# EAGLE board tarjeta-v8 (EAGLE 6.4)
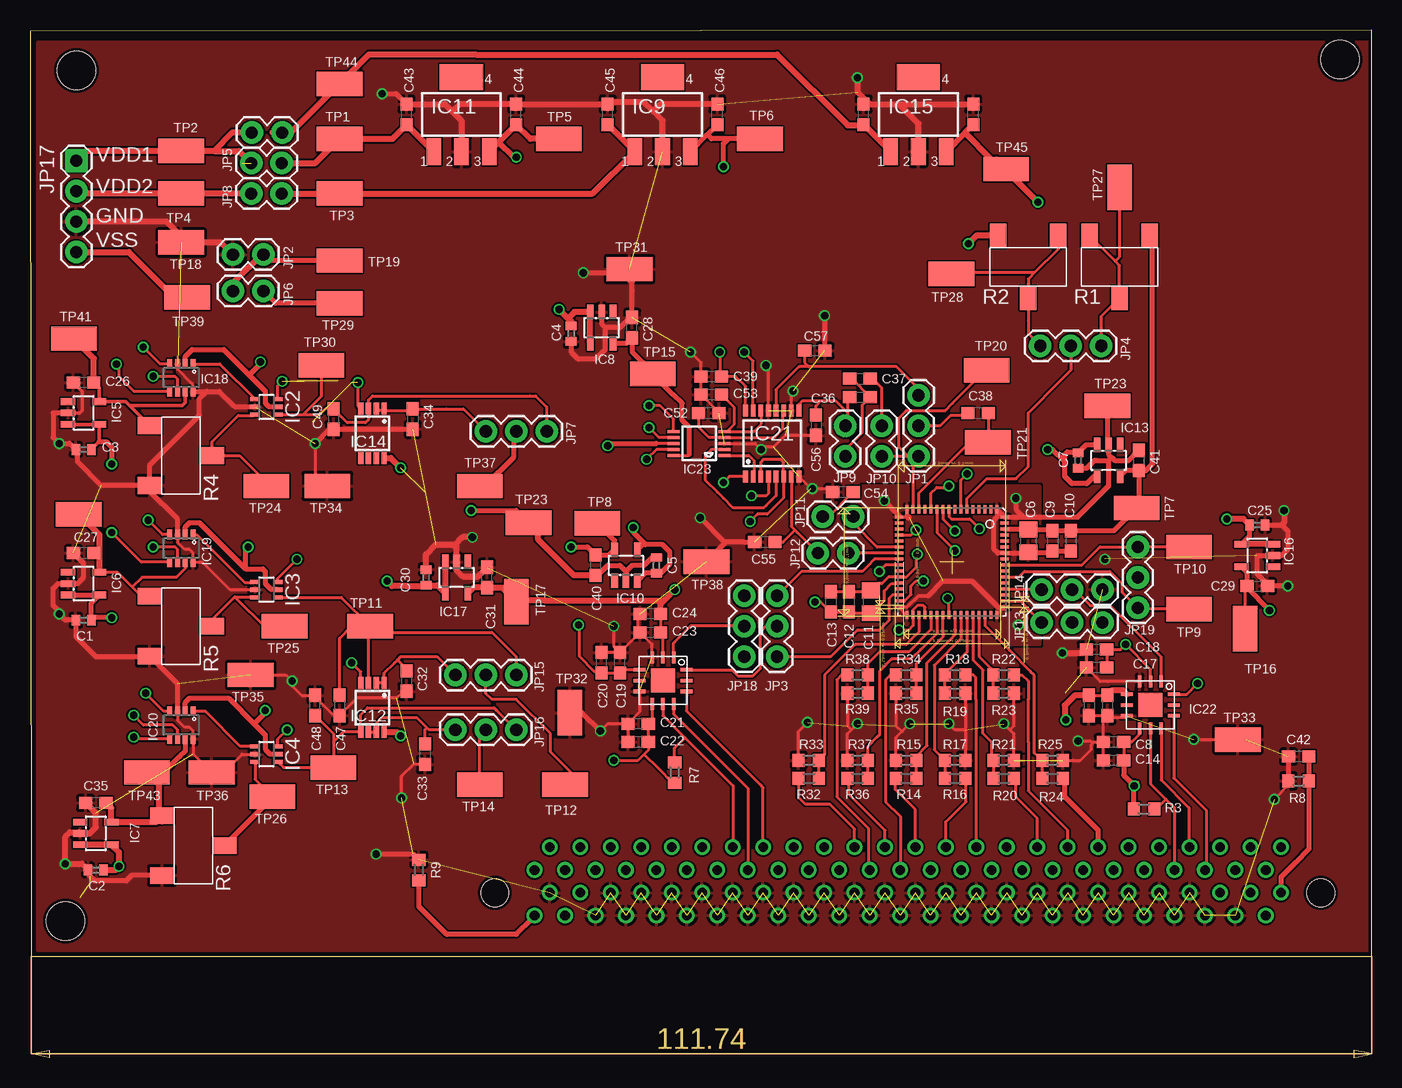
[diagram p0: board, top side]
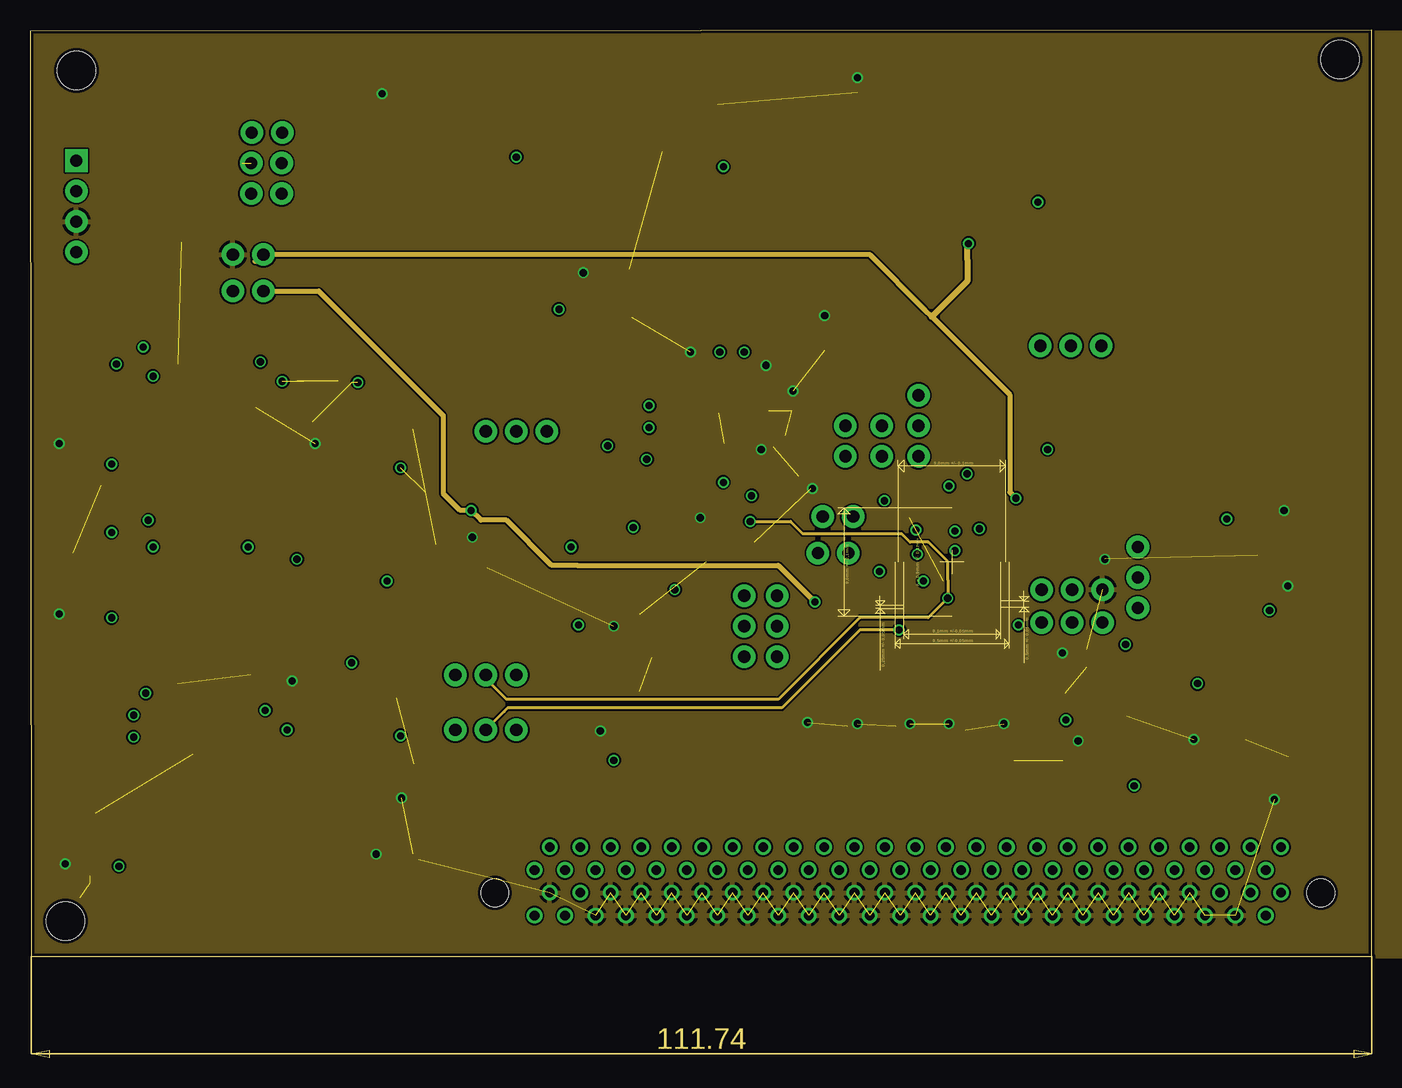
[diagram p1: board, inner layer Route2]
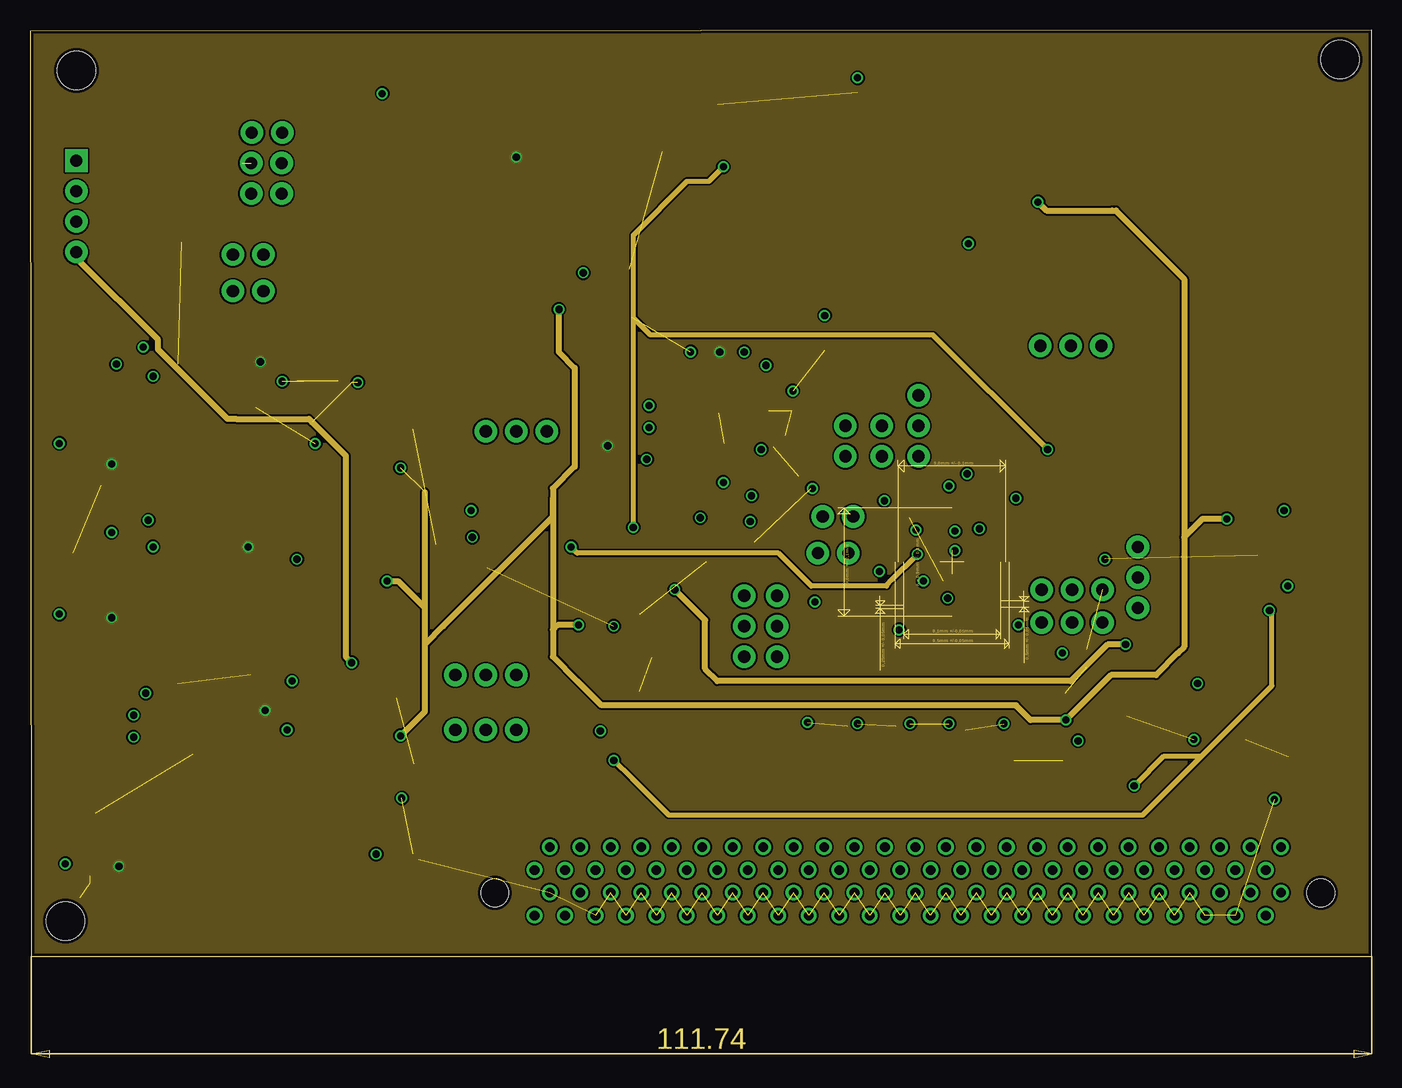
[diagram p2: board, inner layer Route3]
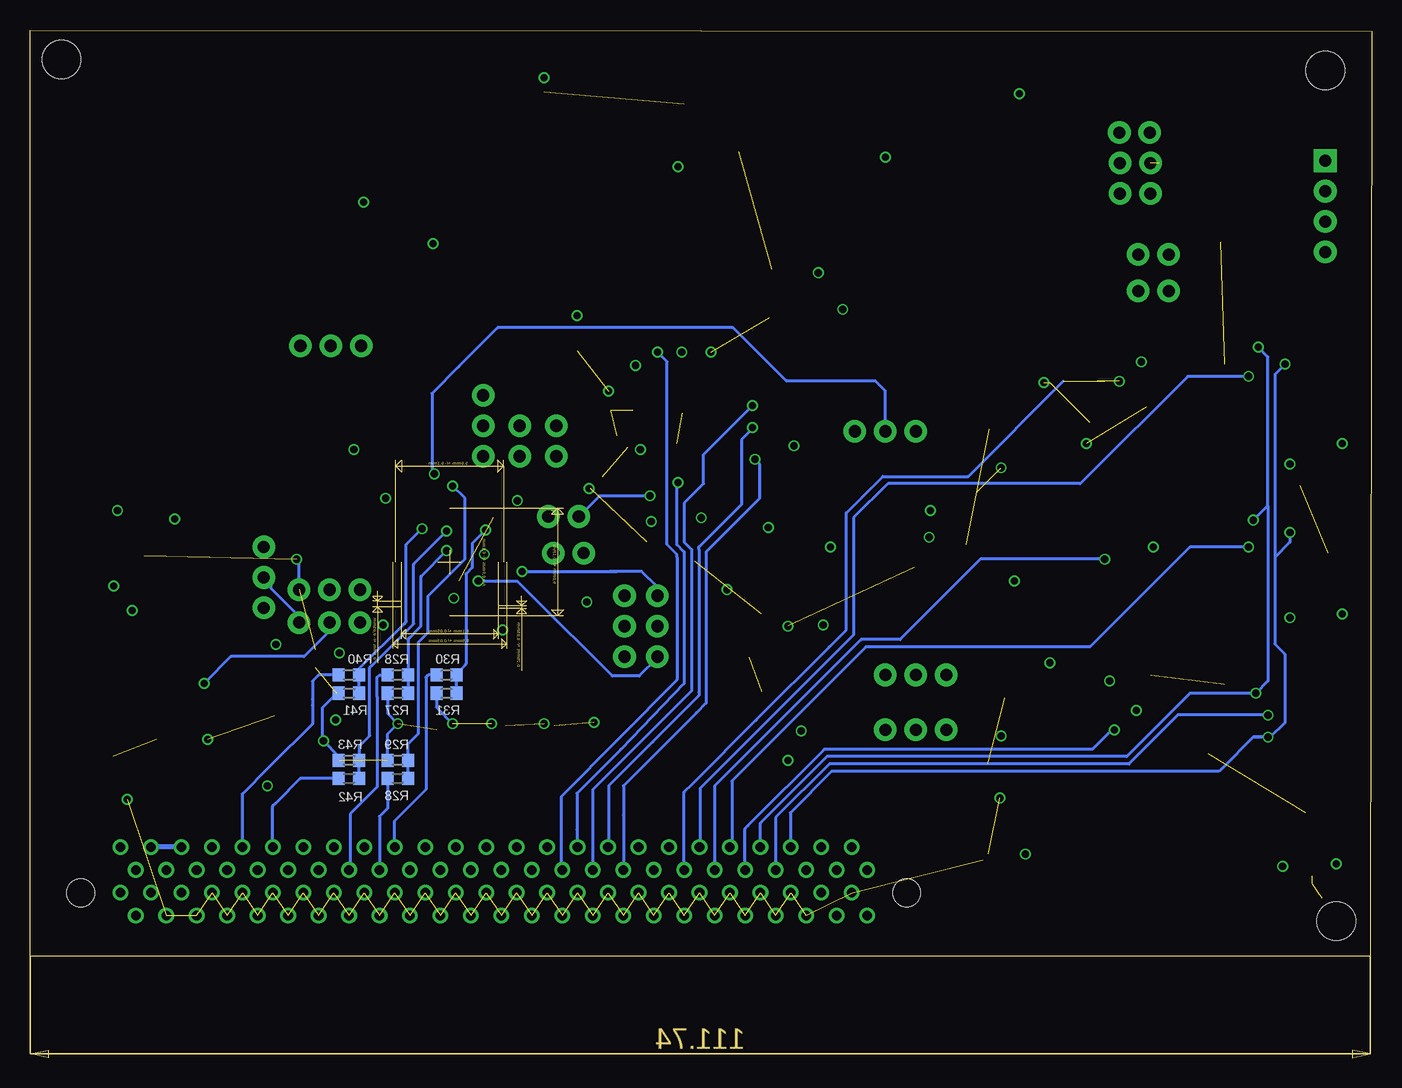
[diagram p3: board, bottom side, seen from below]

Size 111.84 x 77.24 mm. Coordinates in mm from the lower left corner, seen from the top.
Outline: 0.1,0 111.84,0 111.84,77.24 0,77.14 0.1,0
Copper layers [2:(1*2*3*16):3]: Top 0.035mm / dielectric 1.5mm / Route2 0.035mm / dielectric 0.15mm / Route3 0.035mm / dielectric 0.2mm / Bottom 0.035mm
Design rules "ITEADstudio_DRC": minimum track width 6mil, minimum drill 12mil, track to track 6mil, track to pad 6mil, pad to pad 6mil, via to via 6mil, smd to smd 0mil, copper to edge 10mil, drill to drill 10mil, minimum pad ring 10mil, minimum via ring 6mil, stop-mask expansion 2mil, vias tented up to drill 100mil, thermal gap 10mil
Holes 3.2 mm at 2.95,2.95 121.01,2.64 3.86,73.86 109.22,74.78

## Footprints (pad centres in the part's own frame; a part is rotated, then mirrored left to right if it is on the bottom)
C0402 = smd 0.7 x 0.9: 1 -0.65,0; 2 0.65,0
C0805 = smd 1.3 x 1.5: 1 -0.95,0; 2 0.95,0
C0603 = smd 1.1 x 1: 1 -0.85,0; 2 0.85,0
QFN64 = smd 0.7 x 0.25: 1 -14.56,5.02; 2 -14.56,4.52; 3 -14.56,4.02; 4 -14.56,3.52; 5 -14.56,3.02; 6 -14.56,2.52; 7 -14.56,2.02; 8 -14.56,1.52; 9 -14.56,1.02; 10 -14.56,0.52; 11 -14.56,0.02; 12 -14.56,-0.48; 13 -14.56,-0.98; 14 -14.56,-1.48; 15 -14.56,-1.98; 16 -14.56,-2.48; 33 -5.76,-2.48; 34 -5.76,-1.98; 35 -5.76,-1.48; 36 -5.76,-0.98; 37 -5.76,-0.48; 38 -5.76,0.02; 39 -5.76,0.52; 40 -5.76,1.02; 41 -5.76,1.52; 42 -5.76,2.02; 43 -5.76,2.52; 44 -5.76,3.02; 45 -5.76,3.52; 46 -5.76,4.02; 47 -5.76,4.52; 48 -5.76,5.02 | smd 0.25 x 0.7: 17 -13.91,-3.13; 18 -13.41,-3.13; 19 -12.91,-3.13; 20 -12.41,-3.13; 21 -11.91,-3.13; 22 -11.41,-3.13; 23 -10.91,-3.13; 24 -10.41,-3.13; 25 -9.91,-3.13; 26 -9.41,-3.13; 27 -8.91,-3.13; 28 -8.41,-3.13; 29 -7.91,-3.13; 30 -7.41,-3.13; 31 -6.91,-3.13; 32 -6.41,-3.13; 49 -6.41,5.67; 50 -6.91,5.67; 51 -7.41,5.67; 52 -7.91,5.67; 53 -8.41,5.67; 54 -8.91,5.67; 55 -9.41,5.67; 56 -9.91,5.67; 57 -10.41,5.67; 58 -10.91,5.67; 59 -11.41,5.67; 60 -11.91,5.67; 61 -12.41,5.67; 62 -12.91,5.67; 63 -13.41,5.67; 64 -13.91,5.67
SC70 = smd 0.35 x 0.8: 1 -0.65,-0.95; 2 0,-0.95; 3 0.65,-0.95; 4 0.65,0.95; 5 0,0.95; 6 -0.65,0.95
SOT23-5L_2 = smd 0.55 x 1.2: 1 -0.95,-1.3; 2 0,-1.3; 3 0.95,-1.3; 4 0.95,1.3; 5 -0.95,1.3
SOT223 = smd 1.219 x 2.235: 1 -2.311,-3.099; 2 0,-3.099; 3 2.311,-3.099 | smd 3.6 x 2.2: 4 0,3.099
MSOP8 = smd 0.45 x 1: 1 -1.175,-1.875; 2 -0.525,-1.875; 3 0.125,-1.875; 4 0.775,-1.875; 5 0.775,2.225; 6 0.125,2.225; 7 -0.525,2.225; 8 -1.175,2.225
SOT23-8_2 = smd 0.406 x 0.813: 1 -1,-1.04; 2 -0.35,-1.04; 3 0.3,-1.04; 4 0.95,-1.04; 5 0.95,1.26; 6 0.3,1.26; 7 -0.35,1.26; 8 -1,1.26
QSOP16 = smd 0.4 x 1: 1 -2.223,-2.75; 2 -1.588,-2.75; 3 -0.953,-2.75; 4 -0.318,-2.75; 5 0.318,-2.75; 6 0.953,-2.75; 7 1.588,-2.75; 8 2.223,-2.75; 9 2.223,2.75; 10 1.588,2.75; 11 0.953,2.75; 12 0.318,2.75; 13 -0.318,2.75; 14 -0.953,2.75; 15 -1.588,2.75; 16 -2.223,2.75
TQFN12 = smd 1 x 0.3: P$1 0.05,-1.1; P$2 0.05,-2; P$3 0.05,-2.9; P$7 3.95,-2.9; P$8 3.95,-2; P$9 3.95,-1.1 | smd 0.3 x 1: P$4 1.1,-3.95; P$5 2,-3.95; P$6 2.9,-3.95; P$10 2.9,-0.05; P$11 2,-0.05; P$12 1.1,-0.05 | smd 2 x 2: P$13 2,-2
MSOP10 = smd 0.25 x 1: 1 -1,-2.113; 2 -0.5,-2.113; 3 0,-2.113; 4 0.5,-2.113; 5 1,-2.113; 6 1,2.113; 7 0.5,2.113; 8 0,2.113; 9 -0.5,2.113; 10 -1,2.113
FX2-100S-1.27 = drill 0.8: A1 0,0; A2 -1.27,-1.905; A3 -2.54,0; A4 -3.81,-1.905; A5 -5.08,0; A6 -6.35,-1.905; A7 -7.62,0; A8 -8.89,-1.905; A9 -10.16,0; A10 -11.43,-1.905; A11 -12.7,0; A12 -13.97,-1.905; A13 -15.24,0; A14 -16.51,-1.905; A15 -17.78,0; A16 -19.05,-1.905; A17 -20.32,0; A18 -21.59,-1.905; A19 -22.86,0; A20 -24.13,-1.905; A21 -25.4,0; A22 -26.67,-1.905; A23 -27.94,0; A24 -29.21,-1.905; A25 -30.48,0; A26 -31.75,-1.905; A27 -33.02,0; A28 -34.29,-1.905; A29 -35.56,0; A30 -36.83,-1.905; A31 -38.1,0; A32 -39.37,-1.905; A33 -40.64,0; A34 -41.91,-1.905; A35 -43.18,0; A36 -44.45,-1.905; A37 -45.72,0; A38 -46.99,-1.905; A39 -48.26,0; A40 -49.53,-1.905; A41 -50.8,0; A42 -52.07,-1.905; A43 -53.34,0; A44 -54.61,-1.905; A45 -55.88,0; A46 -57.15,-1.905; A47 -58.42,0; A48 -59.69,-1.905; A49 -60.96,0; A50 -62.23,-1.905; B1 0,3.8; B2 -1.27,1.895; B3 -2.54,3.8; B4 -3.81,1.895; B5 -5.08,3.8; B6 -6.35,1.895; B7 -7.62,3.8; B8 -8.89,1.895; B9 -10.16,3.8; B10 -11.43,1.895; B11 -12.7,3.8; B12 -13.97,1.895; B13 -15.24,3.8; B14 -16.51,1.895; B15 -17.78,3.8; B16 -19.05,1.895; B17 -20.32,3.8; B18 -21.59,1.895; B19 -22.86,3.8; B20 -24.13,1.895; B21 -25.4,3.8; B22 -26.67,1.895; B23 -27.94,3.8; B24 -29.21,1.895; B25 -30.48,3.8; B26 -31.75,1.895; B27 -33.02,3.8; B28 -34.29,1.895; B29 -35.56,3.8; B30 -36.83,1.895; B31 -38.1,3.8; B32 -39.37,1.895; B33 -40.64,3.8; B34 -41.91,1.895; B35 -43.18,3.8; B36 -44.45,1.895; B37 -45.72,3.8; B38 -46.99,1.895; B39 -48.26,3.8; B40 -49.53,1.895; B41 -50.8,3.8; B42 -52.07,1.895; B43 -53.34,3.8; B44 -54.61,1.895; B45 -55.88,3.8; B46 -57.15,1.895; B47 -58.42,3.8; B48 -59.69,1.895; B49 -60.96,3.8; B50 -62.23,1.895 | hole 2.3: -65.54,1.905; 3.31,1.905
1X03 = drill 1.016 pad 1.88: 1 -2.54,0; 2 0,0; 3 2.54,0
1X02 = drill 1.016 pad 1.88: 1 -1.27,0; 2 1.27,0
1X04 = drill 1.016 pad 1.88 square: 1 0,0 | drill 1.016 pad 1.88: 2 2.54,0; 3 5.08,0; 4 7.62,0
ST-5EW = smd 1.4 x 2: 1 -2.5,-2.6; 2 0,2.6; 3 2.5,-2.6
R0603 = smd 1 x 1.1: 1 -0.85,0; 2 0.85,0
TP = smd 3.81 x 2.032: TP 0,0

## Placement (x,y rotation side)
C1  [C0402]  4.47,28.04 180 top
C2  4.7uf  [C0402]  5.49,7.21 180 top
C3  [C0402]  4.47,42.27 180 top
C4  4.7uf  [C0402]  45.11,51.92 270 top
C5  [C0402]  52.22,32.61 90 top
C6  [C0805]  83.21,34.65 270 top
C7  [C0402]  87.38,41.35 270 top
C8  CAP_0603  [C0603]  90.32,17.88 180 top
C9  CAP_0603  [C0603]  85.24,34.65 270 top
C10  CAP_0603  [C0603]  86.77,34.65 270 top
C11  [C0805]  70.1,29.57 270 top
C12  CAP_0603  [C0603]  68.28,29.57 270 top
C13  CAP_0603  [C0603]  66.75,29.57 270 top
C14  CAP_0603  [C0603]  90.32,16.36 180 top
C15  CAP_0603  [C0603]  89.81,20.93 270 top
C16  CAP_0603  [C0603]  88.29,20.93 270 top
C17  CAP_0603  [C0603]  88.9,24.08 180 top
C18  CAP_0603  [C0603]  88.9,25.6 180 top
C19  CAP_0603  [C0603]  49.17,24.49 90 top
C20  CAP_0603  [C0603]  47.65,24.49 90 top
C21  CAP_0603  [C0603]  50.7,19.41 180 top
C22  CAP_0603  [C0603]  50.7,17.88 180 top
C23  CAP_0603  [C0603]  51.71,27.03 180 top
C24  CAP_0603  [C0603]  51.71,28.55 180 top
C25  [C0402]  102.31,35.97 0 top
C26  CAP_0603  [C0603]  4.47,47.85 180 top
C27  CAP_0603  [C0603]  4.47,33.63 180 top
C28  0.1uf  [C0603]  50.19,52.43 90 top
C29  0.1uf  [C0603]  102.31,30.89 0 top
C30  4.7uf  [C0402]  33.02,31.6 90 top
C31  0.1uf  [C0603]  38.1,31.6 90 top
C32  CAP_0603  [C0603]  31.39,22.96 270 top
C33  CAP_0603  [C0603]  32.92,16.87 270 top
C34  4.7uf  [C0603]  31.9,44.81 270 top
C35  0.1uf  [C0603]  5.49,12.8 180 top
C36  CAP_0603  [C0603]  69.19,46.63 0 top
C37  CAP_0603  [C0603]  69.19,48.16 0 top
C38  CAP_0603  [C0603]  79.05,45.31 0 top
C39  0.1uF  [C0603]  56.79,48.36 0 top
C40  CAP_0603  [C0603]  47.14,32.61 270 top
C41  CAP_0603  [C0603]  92.46,41.35 90 top
C42  1nf  [C0603]  105.77,16.66 180 top
C43  CAP_0603  [C0603]  31.39,70.21 90 top
C44  CAP_0603  [C0603]  40.54,70.21 90 top
C45  CAP_0603  [C0603]  48.16,70.21 90 top
C46  CAP_0603  [C0603]  57.3,70.21 90 top
C47  CAP_0603  [C0603]  25.81,20.93 270 top
C48  CAP_0603  [C0603]  23.77,20.93 90 top
C49  CAP_0603  [C0603]  25.3,44.81 270 top
C50  CAP_0603  [C0603]  69.49,70.21 90 top
C51  CAP_0603  [C0603]  78.64,70.21 90 top
C52  CAP_0603  [C0603]  56.59,45.31 0 top
C53  CAP_0603  [C0603]  56.79,46.84 180 top
C54  CAP_0603  [C0603]  67.77,38.71 180 top
C55  CAP_0603  [C0603]  61.27,34.54 180 top
C56  CAP_0603  [C0603]  65.51,44.3 270 top
C57  CAP_0603  [C0603]  65.43,50.5 0 top
IC1  THE_BEAN_2  [QFN64]  75.59,22.71 270 top
IC2  [SC70]  19.71,45.82 270 top
IC3  [SC70]  19.71,30.58 270 top
IC4  [SC70]  19.71,16.87 270 top
IC5  1.8V  [SOT23-5L_2]  4.47,45.31 270 top
IC6  1.8V  [SOT23-5L_2]  4.47,31.09 270 top
IC7  1.8V  [SOT23-5L_2]  5.49,10.26 270 top
IC8  1.8V  [SOT23-5L_2]  47.65,52.43 180 top
IC9  [SOT223]  52.73,70.21 0 top
IC10  1.8  [SOT23-5L_2]  49.68,32.61 0 top
IC11  [SOT223]  35.97,70.21 0 top
IC12  OP282  [MSOP8]  28.35,20.93 180 top
IC13  1.8  [SOT23-5L_2]  89.92,41.35 180 top
IC14  OP282  [MSOP8]  28.35,43.79 180 top
IC15  [SOT223]  74.07,70.21 0 top
IC16  1.8V  [SOT23-5L_2]  102.31,33.43 90 top
IC17  1.8V  [SOT23-5L_2]  35.56,31.6 180 top
IC18  AD5160_2  [SOT23-8_2]  12.6,48.36 180 top
IC19  AD5160_2  [SOT23-8_2]  12.6,34.14 180 top
IC20  AD5160_2  [SOT23-8_2]  12.6,19.41 180 top
IC21  [QSOP16]  61.87,42.77 0 top
IC22  [TQFN12]  95.4,22.96 270 top
IC23  DAC7554  [MSOP10]  55.78,42.77 90 top
J1  HIRESO_FX_CONNECTOR  [FX2-100S-1.27]  42.06,7.21 180 top
JP1  JUMPER03  [1X03]  74.07,44.25 270 top
JP2  JUMPER02  [1X02]  18.19,58.52 0 top
JP3  JUMPER03  [1X03]  62.28,27.53 90 top
JP4  JUMPER03  [1X03]  86.77,50.9 0 top
JP5  JUMPER02  [1X02]  19.71,66.14 180 top
JP6  JUMPER02  [1X02]  18.19,55.47 180 top
JP7  JUMPER03  [1X03]  40.54,43.79 0 top
JP8  JUMPER02  [1X02]  19.71,63.6 180 top
JP9  JUMPER02  [1X02]  67.97,42.98 270 top
JP10  JUMPER02  [1X02]  71.02,42.98 270 top
JP11  JUMPER02  [1X02]  67.36,36.68 0 top
JP12  JUMPER02  [1X02]  66.95,33.63 0 top
JP13  JUMPER03  [1X03]  86.87,27.84 180 top
JP14  JUMPER03  [1X03]  86.87,30.58 180 top
JP15  JUMPER03  [1X03]  38,23.47 0 top
JP16  JUMPER03  [1X03]  38,18.9 0 top
JP17  JUMPER04  [1X04]  3.86,66.34 270 top
JP18  JUMPER03  [1X03]  59.54,27.53 90 top
JP19  JUMPER03  [1X03]  92.35,31.6 270 top
JP20  JUMPER02  [1X02]  19.76,68.68 180 top
R1  [ST-5EW]  90.83,57.51 180 top
R2  [ST-5EW]  83.21,57.51 180 top
R3  RES_0603  [R0603]  92.86,12.29 180 top
R4  [ST-5EW]  12.6,41.76 270 top
R5  [ST-5EW]  12.6,27.53 270 top
R6  [ST-5EW]  13.61,9.25 270 top
R7  RES_0603  [R0603]  53.75,15.34 270 top
R8  1M  [R0603]  105.77,14.63 0 top
R9  RES_0603  [R0603]  32.41,7.21 270 top
R14  RES_0603  [R0603]  73.05,14.83 180 top
R15  RES_0603  [R0603]  73.05,16.36 0 top
R16  RES_0603  [R0603]  77.11,14.83 0 top
R17  RES_0603  [R0603]  77.11,16.36 180 top
R18  RES_0603  [R0603]  77.11,23.47 0 top
R19  RES_0603  [R0603]  77.11,21.95 180 top
R20  RES_0603  [R0603]  81.18,14.83 0 top
R21  RES_0603  [R0603]  81.18,16.36 180 top
R22  RES_0603  [R0603]  81.18,23.47 0 top
R23  RES_0603  [R0603]  81.18,21.95 180 top
R24  RES_0603  [R0603]  85.24,14.83 0 top
R25  RES_0603  [R0603]  85.24,16.36 180 top
R26  RES_0603  [R0603]  81.18,23.47 180 bottom
R27  RES_0603  [R0603]  81.18,21.95 0 bottom
R28  RES_0603  [R0603]  81.18,14.83 180 bottom
R29  RES_0603  [R0603]  81.18,16.36 0 bottom
R30  RES_0603  [R0603]  77.11,23.47 180 bottom
R31  RES_0603  [R0603]  77.11,21.95 0 bottom
R32  RES_0603  [R0603]  64.92,14.83 180 top
R33  RES_0603  [R0603]  64.92,16.36 0 top
R34  0  [R0603]  73.05,23.47 180 top
R35  0  [R0603]  73.05,21.95 0 top
R36  RES_0603  [R0603]  68.99,14.83 180 top
R37  RES_0603  [R0603]  68.99,16.36 0 top
R38  RES_0603  [R0603]  68.99,23.47 180 top
R39  RES_0603  [R0603]  68.99,21.95 0 top
R40  RES_0603  [R0603]  85.24,23.47 180 bottom
R41  RES_0603  [R0603]  85.24,21.95 0 bottom
R42  RES_0603  [R0603]  85.24,14.83 180 bottom
R43  RES_0603  [R0603]  85.24,16.36 0 bottom
TP1  [TP]  25.81,68.17 0 top
TP2  [TP]  12.6,67.16 0 top
TP3  [TP]  25.81,63.6 0 top
TP4  [TP]  12.6,63.6 0 top
TP5  [TP]  44.09,68.17 0 top
TP6  [TP]  60.86,68.17 0 top
TP7  [TP]  92.25,37.39 180 top
TP8  [TP]  47.3,36.12 0 top
TP9  [TP]  96.62,28.96 0 top
TP10  [TP]  96.62,34.14 0 top
TP11  [TP]  28.35,27.53 0 top
TP12  [TP]  44.6,14.33 0 top
TP13  [TP]  25.3,15.75 0 top
TP14  [TP]  37.49,14.33 0 top
TP15  [TP]  51.92,48.56 0 top
TP16  [TP]  101.3,27.33 90 top
TP17  [TP]  40.54,29.57 270 top
TP18  [TP]  12.6,59.54 0 top
TP19  [TP]  25.81,58.01 0 top
TP20  [TP]  79.76,48.87 180 top
TP21  [TP]  79.86,42.88 180 top
TP22  [TP]  89.81,45.92 0 top
TP23  [TP]  41.55,36.17 0 top
TP24  [TP]  19.71,39.22 0 top
TP25  [TP]  21.23,27.53 0 top
TP26  [TP]  20.22,13.31 0 top
TP27  [TP]  90.83,64.11 90 top
TP28  [TP]  76.81,56.9 180 top
TP29  [TP]  25.81,54.46 0 top
TP30  [TP]  24.28,49.28 0 top
TP31  [TP]  49.99,57.3 0 top
TP32  [TP]  45.01,20.32 90 top
TP33  [TP]  100.69,18.08 0 top
TP34  [TP]  24.79,39.22 0 top
TP35  [TP]  18.39,23.47 0 top
TP36  [TP]  15.14,15.34 0 top
TP37  [TP]  37.49,39.22 0 top
TP38  [TP]  56.39,32.92 0 top
TP39  [TP]  13.11,54.97 0 top
TP41  [TP]  3.66,51.51 0 top
TP42  [TP]  4.06,36.88 0 top
TP43  [TP]  9.75,15.34 0 top
TP44  [TP]  25.81,72.75 0 top
TP45  [TP]  81.38,65.63 0 top
U$5  [TQFN12]  54.76,24.99 270 top

## Library data of the parts
C1-C57 IC1-IC8 IC10 IC12-IC14 IC16-IC23 J1 JP1-JP20 R1-R9 R14-R43 TP1-TP39 TP41-TP45 U$5 = wac
IC9 IC11 IC15 = linear

## Nets
!CS_ADC1: IC22.P$9 J1.A44
!CS_ADC2: J1.A15 U$5.P$9
!CS_DAC: IC23.9 J1.A17
ADC1_IN+: IC22.P$12 JP13.2
ADC1_IN-: IC22.P$1 JP14.2
ADC2_IN+: JP3.2 U$5.P$12
ADC2_IN-: JP18.2 U$5.P$1
AGND: C6.2 C7.2 C9.2 C10.2 C41.2 IC1.1 IC1.16 IC1.17 IC1.32 IC1.33 IC1.48 IC1.49 IC1.58 IC1.64 IC13.2 JP2.2 JP6.2 R2.3 TP19.TP TP22.TP
AVDD: C6.1 C9.1 C10.1 C41.1 IC1.62 IC13.5 R1.1 TP7.TP
BASELINE: IC1.56 JP19.1 TP10.TP
CAP_PRECHAR: C38.2 IC1.14 TP21.TP
CAP_PRECHAR_1: C57.1 IC21.12 JP1.1
CLK: IC1.20 R30.1 R31.2
CLK_ADC1: IC22.P$10 J1.A45
CLK_ADC2: J1.A16 U$5.P$10
CLK_DAC: IC23.6 J1.A19
CLK_PRECH1: IC1.9 R40.1 R41.2
CLK_PRECH1_T: J1.A42 R40.2
CLK_PRECH2: IC1.10 R42.1 R43.2
CLK_PRECH2_T: J1.A40 R42.2
CLK_REF: IC18.4 IC19.4 IC20.4 J1.A8
CLK_T: J1.A32 R30.2
CS_B0: IC1.41 R14.1 R15.2
CS_B0_T: J1.A26 R14.2
CS_B1: IC1.42 R16.1 R17.2
CS_B1_T: J1.A28 R16.2
CS_B2: IC1.43 R18.1 R19.2
CS_B2_T: J1.A30 R18.2
CS_B3: IC1.44 R20.1 R21.2
CS_B3_T: J1.A34 R20.2
CS_B4: IC1.45 R22.1 R23.2
CS_B4_T: J1.A36 R22.2
CS_B5: IC1.46 R24.1 R25.2
CS_B5_T: J1.A38 R24.2
CS_REF_1: IC18.6 J1.A12
CS_REF_2: IC19.6 J1.A10
CS_REF_3: IC20.6 J1.A7
DGND: C5.2 C11.2 C12.2 C13.2 C40.2 IC1.28 IC10.2 JP6.1 TP23.TP TP29.TP
DVDD: C11.1 C12.1 C13.1 C40.1 IC1.27 IC10.5 TP8.TP
GND: C1.2 C2.2 C3.2 C4.2 C8.2 C14.2 C15.2 C16.2 C17.2 C18.2 C19.2 C20.2 C21.2 C22.2 C23.2 C24.2 C25.2 C26.2 C27.2 C28.2 C29.2 C30.2 C31.2 C32.2 C33.2 C34.2 C35.2 C39.1 C42.2 C43.2 C44.2 C45.2 C46.2 C47.2 C48.2 C49.2 C50.2 C51.2 C52.2 C53.2 C54.2 C55.2 C56.2 C57.2 IC2.2 IC3.2 IC4.2 IC5.2 IC6.2 IC7.2 IC8.2 IC9.2 IC11.2 IC15.2 IC16.2 IC17.2 IC18.3 IC18.8 IC19.3 IC19.8 IC20.3 IC20.8 IC21.8 IC21.10 IC21.13 IC22.P$3 IC22.P$6 IC23.3 J1.B2 J1.B5 J1.B6 J1.B7 J1.B8 J1.B9 J1.B10 J1.B11 J1.B12 J1.B13 J1.B14 J1.B15 J1.B16 J1.B17 J1.B18 J1.B19 J1.B20 J1.B21 J1.B22 J1.B23 J1.B24 J1.B25 J1.B26 J1.B27 J1.B28 J1.B29 J1.B30 J1.B31 J1.B32 J1.B33 J1.B34 J1.B35 J1.B36 J1.B37 J1.B38 J1.B39 J1.B40 J1.B41 J1.B42 J1.B43 J1.B44 J1.B45 J1.B47 JP2.1 JP14.1 JP17.3 R4.3 R5.3 R6.3 R8.1 R9.1 R15.1 R17.1 R19.1 R21.1 R23.1 R25.1 R27.1 R29.1 R31.1 R33.1 R35.1 R37.1 R39.1 R41.1 R43.1 TP18.TP TP31.TP TP32.TP TP33.TP TP34.TP TP35.TP TP36.TP TP38.TP U$5.P$3 U$5.P$6
HOLD: IC1.37 R38.1 R39.2
HOLD_T: J1.A23 R38.2
MUX_DAC_EN: IC21.15 J1.A21
MUX_DAC_SEL: IC21.1 J1.A20
MUX_REF_1: IC2.6 J1.A13
MUX_REF_2: IC3.6 J1.A11
MUX_REF_3: IC4.6 J1.A9
N$1: C36.2 C37.1 JP9.2
N$2: J1.B1 R9.2
N$3: C37.2 JP10.1
N$4: J1.A46 J1.A48
N$5: IC4.1 IC20.1
N$6: C38.1 JP1.2
N$9: JP13.1 JP19.2
N$10: C42.1 J1.B50 R8.2
N$17: IC2.1 IC18.1
N$19: IC3.1 IC19.1
OP_MODE: IC1.11 R26.1 R27.2
OP_MODE_T: J1.A35 R26.2
OUT_S: IC1.35 R32.1 R33.2
OUT_S_T: J1.A22 R32.2
POT_R1: JP4.3 R1.2 R1.3 TP27.TP
POT_R2: JP4.1 R2.1 R2.2 TP28.TP
POT_R4: IC2.3 R4.2 TP24.TP
POT_R5: IC3.3 R5.2 TP25.TP
POT_R6: IC4.3 R6.2 TP26.TP
REF_ADC: C17.1 C18.1 C23.1 C24.1 C31.1 IC17.5 IC22.P$2 TP17.TP U$5.P$2
REFIN_DAC: C28.1 IC8.5 IC23.10 TP15.TP
RES_BIAS_EXT: IC1.6 JP4.2
RST: IC1.38 R36.1 R37.2
RST_CSA: IC1.12 R28.1 R29.2
RST_CSA_T: J1.A33 R28.2
RST_T: J1.A24 R36.2
SDI_DAC: IC23.7 J1.A18
SDI_REF: IC18.5 IC19.5 IC20.5 J1.A6
SDO_ADC1: IC22.P$8 J1.A43 R3.1
SDO_ADC2: J1.A14 R7.1 U$5.P$8
SGN: IC1.39 R34.1 R35.2
SGN_T: J1.A25 R34.2
V0NDAC: IC21.5 IC23.2
V0PDAC: IC21.2 IC23.1
V1NDAC: C53.1 IC21.14 IC23.5
V1PDAC: C52.1 IC21.11 IC23.4
V_REF_PRECHAR: IC1.7 JP7.2 TP37.TP
V_REF_PRECHAR_BUFF: C34.1 IC14.1 IC14.2 JP7.1
VDD: C1.1 C2.1 C3.1 C39.2 C44.1 IC2.5 IC3.5 IC4.5 IC5.3 IC5.4 IC6.3 IC6.4 IC7.3 IC7.4 IC11.3 IC18.2 IC19.2 IC20.2 IC21.16 IC23.8 TP5.TP
VDD2: C5.1 C7.1 C46.1 IC9.3 IC10.3 IC10.4 IC13.3 IC13.4 TP6.TP
VDD3: C4.1 C15.1 C16.1 C19.1 C20.1 C25.1 C30.1 C51.1 IC8.3 IC8.4 IC12.8 IC14.8 IC15.3 IC16.3 IC16.4 IC17.3 IC17.4 IC22.P$4 TP45.TP U$5.P$4
VDD_REF_1: C26.1 IC5.5 IC18.7 R4.1 TP41.TP
VDD_REF_2: C27.1 IC6.5 IC19.7 R5.1 TP42.TP
VDD_REF_3: C35.1 IC7.5 IC20.7 R6.1 TP43.TP
VDD_SUPPLY_1: C43.1 IC11.1 JP5.1 TP1.TP
VDD_SUPPLY_2: C45.1 IC9.1 JP8.1 TP3.TP
VDD_SUPPLY_3: C50.1 IC15.1 JP20.1 TP44.TP
VDD_SUPPLY_IN_1: JP5.2 JP17.1 JP20.2 TP2.TP
VDD_SUPPLY_IN_2: JP8.2 JP17.2 TP4.TP
VI+_FIL: IC1.22 JP11.2
VI+_FIL_DAC: C54.1 IC21.4 JP11.1
VI-_FIL: IC1.23 JP12.2
VI-_FIL_DAC: C55.1 IC21.7 JP12.1
VICM: IC1.40 IC21.3 IC21.6 JP15.2 TP12.TP
VICM_BUFF: C32.1 IC12.1 IC12.2 JP15.1
VICM_MUX: C47.1 IC3.4 IC12.3 JP15.3 TP11.TP
VIN_CSA: IC1.15 JP1.3 JP10.2 TP20.TP
VIN_CSA_1: C36.1 C56.1 IC21.9 JP9.1
VL_ADC: C8.1 C14.1 C21.1 C22.1 C29.1 IC16.5 IC22.P$7 R3.2 R7.2 TP16.TP U$5.P$7
VO+_BP_FIL: IC1.24 JP3.3
VO+_CH: IC1.50 JP13.3
VO+_FIL: IC1.30 JP3.1
VO-_BP_FIL: IC1.25 JP18.3
VO-_CH: IC1.52 JP14.3
VO-_FIL: IC1.31 JP18.1
VOCM: IC1.34 IC1.36 JP16.2 TP14.TP
VOCM_1: C49.1 IC2.4 IC14.3 JP7.3 TP30.TP
VOCM_BUFF: C33.1 IC12.6 IC12.7 JP16.1
VOCM_MUX: C48.1 IC4.4 IC12.5 JP16.3 TP13.TP
VOUT_CSA: IC1.54 JP19.3 TP9.TP
VSS: IC12.4 IC14.4 JP17.4 TP39.TP

## Tracks (layer width: path | path; a pad name or v marks a point on that pad's centre or on a via)
!CS_ADC1
  Top 0.254: IC22.P$9 94.3,14.71 96.62,12.39 96.62,9.17 J1.A44
!CS_ADC2
  Top 0.254: U$5.P$9 53.66,20.2 59.84,14.02 J1.A15
!CS_DAC  (via drill 0.6)
  Top 0.254: IC23.9 52.23,42.27 v51.41,41.45
  Bottom 0.254: J1.A17 62.38,11.79 62.38,14.22 56.29,20.32 55.47,21.13 55.47,21.54 55.47,33.73 55.07,34.14 51,38.2 51,41.05 v51.41,41.45
ADC1_IN+  (via drill 0.6)
  Top 0.254: IC22.P$12 96.44,21.86 v97.33,22.76
  Bottom 0.254: JP13.2 86.87,27.13 89,24.99 95.1,24.99 v97.33,22.76
ADC1_IN-
  Top 0.254: JP14.2 87.07,30.58 88.39,29.26 90.02,29.26 91.85,27.43 94.3,24.98 IC22.P$1
ADC2_IN+
  Top 0.254: JP3.2 61.37,27.53 60.86,27.03 60.86,23.98 60.35,23.47 60.25,23.37 59.03,23.37 58.5,23.89 U$5.P$12
ADC2_IN-
  Top 0.254: JP18.2 55.07,27.53 53.75,26.21 53.66,26.13 U$5.P$1
AGND  (via drill 0.6)  (1 unrouted)
  Top 0.254: IC1.48 IC1.49 | 89.81,42.75 IC13.2 | IC1.16 73.11,36.72 | 73.25,36.58 72.44,36.58 72.44,36.78 | IC1.32 72.46,29.04 73.05,28.45
  Top 0.305: IC1.32 73.11,29.12 74.07,30.07 74.88,30.07
  Top 0.406: 19.3,58.52 JP2.2 19.96,58.01 TP19.TP | 17.07,55.63 JP6.2 | C10.2 C9.2 85.14,33.7 C6.2 83.13,33.62 IC1.58 80.68,33.62 80.37,33.93 80.37,36.37 80.61,36.62 IC1.1 IC1.64 82.85,36.62 | IC13.2 89.92,41.86 90.17,41.6 | 90.17,41.6 90.42,41.35 91.61,41.35 C41.2 92.56,42.3 | C7.2 88.09,40.7 88.74,41.35 88.9,41.35 89.92,41.35 | 89.92,41.35 90.17,41.6 | 82.85,36.62 87.32,36.62 89.41,38.71 89.92,39.22 89.92,41.35 | v82.2,38.2 82.2,37.27 82.85,36.62 | TP22.TP 89.81,42.75 | 72.44,36.78 v71.22,38 71.22,38.2 | 74.88,30.07 76.1,31.29 78.54,31.29 80.77,29.06 81.2,29.06 IC1.49
  Top 0.508: 19.3,58.52 17.07,56.29 17.07,55.63 | v78.23,59.44 78.9,60.11 R2.3 | 73.11,36.72 73.25,36.58
  Route2 0.406: v82.2,38.2 81.69,38.71 81.69,46.84 75.18,53.34 74.58,53.95 70,58.52 JP2.2 | JP2.2 19.3,58.52 18.75,57.96 18.9,57.96 JP2.2
  Route2 0.508: 75.18,53.34 78.13,56.29 78.13,58.12 78.13,59.33 v78.23,59.44
  other vias: 82.4,27.64
  pour Top: 84.23,39.22 68.48,39.22 68.48,26.01 84.23,26.01
AVDD
  Top 0.406: IC1.62 83.19,35.62 C6.1 85.14,35.6 C9.1 C10.1 90.36,35.5 TP7.TP 92.46,37.59 C41.1 | C41.1 91.32,40.5 IC13.5 | 93.68,60.55 93.68,60.45 R1.1 93.57,59.86 93.57,41.05 93.03,40.5 C41.1
BASELINE
  Top 0.254: IC1.56 87.69,32.62 89.2,34.14 JP19.1 TP10.TP
CAP_PRECHAR
  Top 0.254: C38.2 79.9,42.91 TP21.TP 79.66,42.67 78.13,42.67 74.11,38.65 IC1.14
CAP_PRECHAR_1
  Top 0.254: JP1.1 74.07,47.35 72.24,49.17 65.13,49.17 64.92,49.17 | IC21.12 62.18,45.54 62.18,47.24 64.11,49.17 64.92,49.17 | C57.1 64.58,49.52 64.92,49.17
CLK  (via drill 0.6)
  Top 0.254: IC1.20 73.42,35.12 v73.86,35.56
  Bottom 0.254: R30.1 R31.2 76.27,23.61 75.59,24.28 75.49,24.38 75.49,31.9 74.98,32.41 74.98,34.44 v73.86,35.56
CLK_ADC1
  Top 0.254: IC22.P$10 95.35,14.88 98.04,12.19 98.04,7.32 J1.A45
CLK_ADC2
  Top 0.254: U$5.P$10 54.71,20.47 60.86,14.33 61.11,14.07 J1.A16
CLK_DAC  (via drill 0.6)
  Top 0.254: IC23.6 53.67,44.78 52.53,45.92 v51.61,45.92
  Bottom 0.254: J1.A19 64.92,13.92 64.67,14.17 56.9,21.95 56.69,22.15 56.69,22.35 56.69,33.93 57.3,34.54 57.3,34.75 57.3,37.8 55.68,39.42 55.68,41.86 v51.61,45.92
CLK_PRECH1  (via drill 0.6)
  Top 0.254: IC1.9 76.61,36.67 76.81,36.47 78.33,36.47 v79.15,35.66
  Bottom 0.254: v79.15,35.66 80.47,34.34 80.47,27.94 80.67,27.74 84.39,24.02 R40.1 R41.2
CLK_PRECH1_T
  Bottom 0.254: 88.29,21.44 88.29,20.93 | 88.29,20.93 88.29,19.41 91.85,15.85 94.13,13.56 J1.A42 | R40.2 87.78,23.47 88.29,22.96 88.29,20.93
CLK_PRECH2  (via drill 0.6)
  Top 0.254: IC1.10 76.11,36.46 v77.12,35.46
  Bottom 0.254: v77.12,35.46 79.86,32.72 79.86,27.74 83.31,24.28 83.52,24.08 83.52,18.39 84.39,17.51 R43.2 R42.1
CLK_PRECH2_T
  Bottom 0.254: R42.2 89.31,14.83 91.34,12.8 91.59,12.55 J1.A40
CLK_REF  (via drill 0.6)
  Top 0.254: IC20.4 11.15,20.45 v9.65,21.95 | IC18.4 10.85,49.4 v9.45,50.8 | IC19.4 11.05,35.18 v9.86,36.37
  Bottom 0.254: J1.A8 50.95,11.12 50.9,11.18 45.42,16.66 20.42,16.66 20.02,17.07 15.14,21.95 v9.65,21.95 8.64,22.96 8.64,37.59 | 8.64,37.59 v9.86,36.37 8.64,37.59 | 8.64,37.59 8.64,49.99 v9.45,50.8
CLK_T
  Bottom 0.254: R30.2 78.64,23.47 78.84,23.27 78.84,13.92 81.48,11.28 81.48,9.17 J1.A32
CS_B0
  Top 0.254: R14.1 R15.2 73.9,16.7 74.78,17.58 74.78,24.49 77.01,26.72 77.11,26.82 IC1.41
CS_B0_T
  Top 0.254: J1.A26 73.81,12.24 72.14,13.92 72.14,14.77 R14.2
CS_B1
  Top 0.254: R16.1 R17.2 75.39,17.23 75.39,24.28 77.61,26.51 IC1.42
CS_B1_T
  Top 0.254: J1.A28 76.35,11.23 78.03,12.9 78.03,14.77 R16.2
CS_B2
  Top 0.254: IC1.43 78.11,25.38 77.62,24.89 76.4,23.67 76.27,23.53 R18.1 R19.2
CS_B2_T
  Top 0.254: J1.A30 78.84,9.17 78.84,21.44 78.84,23.27 78.64,23.47 R18.2
CS_B3
  Top 0.254: R20.1 R21.2 80.16,16.52 80.16,17.88 79.45,18.59 79.45,23.88 79.25,24.08 78.61,24.72 IC1.44
CS_B3_T
  Top 0.254: J1.A34 83.97,11.53 82.2,13.31 82.2,14.67 R20.2
CS_B4
  Top 0.254: IC1.45 79.11,25.03 80.16,23.98 80.16,23.64 R22.1 R23.2
CS_B4_T
  Top 0.254: J1.A36 86.51,10.52 85.75,11.28 83.21,13.82 83.21,17.88 83.21,19.91 83.21,21.44 83.21,22.96 82.7,23.47 R22.2
CS_B5
  Top 0.254: R24.1 R25.2 84.33,16.36 83.72,16.97 83.72,23.47 83.41,23.77 81.69,25.5 79.61,27.58 IC1.46
CS_B5_T
  Top 0.406: J1.A38 89.05,10.52 86.26,13.31 86.26,14.67 R24.2
CS_REF_1  (via drill 0.6)
  Top 0.254: IC18.6 12.3,48.15 12.09,48.36 v10.26,48.36
  Bottom 0.254: v10.26,48.36 15.34,48.36 23.88,39.83 24.28,39.42 40.34,39.42 43.18,36.58 43.18,26.82 44.4,25.6 55.98,14.02 55.98,9.17 J1.A12
CS_REF_2  (via drill 0.6)
  Top 0.254: IC19.6 12.3,33.93 12.09,34.14 v10.26,34.14
  Bottom 0.254: v10.26,34.14 15.14,34.14 23.47,25.81 42.16,25.81 53.34,14.63 53.34,9.27 J1.A10
CS_REF_3  (via drill 0.6)
  Top 0.254: IC20.6 12.3,18.89 11.89,19.3 9.45,19.3 v8.64,20.12
  Bottom 0.254: v8.64,20.12 16.16,20.12 20.22,16.05 45.21,16.05 49.68,11.58 J1.A7
DGND  (via drill 0.6)
  Top 0.254: IC1.28 72.43,31.09 71.83,31.09 71.22,30.48 71.22,29.67 70.17,28.62 C11.2 68.38,28.62 C12.2 C13.2 65.9,29.57 v65.43,29.57
  Top 0.406: C40.2 47.31,31.76 48.16,32.61 49.17,32.61 49.68,32.11 | 49.68,32.11 IC10.2 | C5.2 51.86,33.26 51.21,32.61 50.19,32.61 49.68,32.11 | TP29.TP 20.47,54.46 JP6.1 | v36.78,37.19 40.54,37.19 TP23.TP 42.37,35.36
  Top 0.508: C40.2 45.35,31.76 42.37,34.75 42.37,35.36
  Route2 0.406: v65.43,29.57 62.38,32.61 45.62,32.61 43.48,32.61 39.73,36.37 37.59,36.37 v36.78,37.19 35.86,37.19 34.44,38.61 34.44,45.11 24.08,55.47 JP6.1
DVDD  (via drill 0.6)
  Top 0.254: C13.1 C12.1 70,30.42 C11.1 70.68,31.09 71.02,31.09 71.55,31.62 IC1.27 73.05,31.62 73.86,32.43 73.86,33.43 v73.97,33.53
  Top 0.406: TP8.TP 48.73,34.68 IC10.5 48.28,33.46 C40.1 46.47,34.14 v45.11,34.14
  Route3 0.406: v45.11,34.14 45.62,33.63 62.38,33.63 64.92,31.09 65.13,30.89 71.42,30.89 71.42,30.99 71.83,31.39 v73.97,33.53
GND  (via drill 0.6)  (76 unrouted)
  Top 0.254: IC18.3 12.3,48.97 13.41,47.85 | 13.41,47.85 13.51,47.75 | IC18.8 13.6,47.67 13.41,47.85 | C52.2 57.44,45.34 C53.2 C39.1 55.95,49.52 v55.07,50.39 | IC19.3 12.3,34.54 12.4,34.44 12.9,33.93 13.31,33.93 13.6,33.65 13.6,33.24 IC19.8 14.37,32.88 16.66,30.58 IC3.2 | IC20.3 12.3,19.71 12.4,19.61 12.9,19.1 13.31,19.1 13.51,18.9 13.6,18.81 13.6,18.41 IC20.8 13.6,16.88 TP36.TP 16.16,15.34 17.68,16.87 IC4.2 | C16.2 C15.2 | R8.1 104.92,14.29 v103.73,13.11 | 81.69,18.9 82.03,19.24 R27.1 | 81.69,18.9 v81.18,19.41 | R29.1 82.03,18.56 81.69,18.9 | 77.97,18.9 R17.1 | R15.1 72.2,17.44 72.2,18.25 72.7,18.75 | R31.1 77.97,18.9 | 77.97,18.9 77.12,18.9 v76.61,19.41 | 72.7,18.75 v73.36,19.41 | R35.1 72.2,19.24 72.7,18.75 | R37.1 68.14,18.56 68.48,18.9 | 68.48,18.9 v68.99,19.41 | R39.1 68.14,19.24 68.48,18.9 | v23.77,42.77 23.77,40.23 TP34.TP | C32.2 31.15,22.11 30.58,21.54 27.27,21.54 C47.2 25.67,20.22 25.2,20.22 23.77,21.64 C48.2 23.74,21.74 22.66,21.74 21.84,22.55 v21.84,22.96 21.34,23.47 TP35.TP | C21.2 C22.2 | C19.2 C20.2 | C23.2 51.21,27.03 C23.2 | C23.2 50.7,27.03 | 50.7,27.03 50.7,28.38 C24.2 | U$5.P$3 51.86,26.03 C23.2 | v48.67,27.53 48.67,25.84 C19.2 | 50.7,27.03 50.7,26.86 C19.2 | U$5.P$6 50.81,20.37 C21.2 | C14.2 C8.2 | C15.2 89.81,19.91 91.31,19.91 IC22.P$6 | C18.2 C17.2 89.22,22.91 89.87,22.91 IC22.P$3 | IC23.3 60.45,42.77 v60.96,42.27 61.16,42.47 61.98,42.47 62.95,43.45 C56.2 | IC21.10 63.46,47 v63.6,47.14 | IC21.8 65.11,39.01 v65.23,39.01 66.61,39.01 C54.2 | IC21.13 61.56,49.09 v61.37,49.28 | R33.1 64.07,18.76 v64.82,19.51 | v97.03,18.09 101.3,18.09 TP33.TP | C21.2 48.16,19.41 v47.55,18.8 | v30.99,13.21 30.99,15.04 32,16.05 32.88,16.05 C33.2
  Top 0.254: R43.1 86.97,16.36 87.58,16.36 88.49,17.27 88.49,17.68 88.7,17.88 | 88.7,17.88 88.49,17.88 88.39,17.98 87.78,17.98 v87.38,17.98 | 88.7,17.88 C8.2 | C8.2 89.47,19.74 C15.2 | 4.98,7.07 C2.2
  Top 0.305: IC5.2 4.17,45.31 4.37,45.52 4.37,47.1 C26.2
  Top 0.406: IC5.2 1.93,45.31 1.93,43.28 v2.44,42.77 3.31,42.77 C3.2 3.96,42.12 3.96,41.25 5.96,39.26 R4.3 | C27.2 4.47,32.78 4.47,31.6 3.96,31.09 IC6.2 2.34,31.09 1.93,30.68 1.93,29.26 2.44,28.75 v2.44,28.55 2.95,28.04 C1.2 3.82,26.66 5.49,24.99 9.96,24.99 R5.3 12.3,22.73 IC20.3 | IC18.8 14.73,47.1 | 14.73,47.1 15.79,47.1 16.97,45.92 17.07,45.82 IC2.2 | R4.3 10,40.99 14.12,45.11 14.12,46.49 14.73,47.1 | R4.3 10,38.77 12.09,36.68 12.3,36.47 IC19.3 | v23.77,42.77 24.96,43.96 C49.2 C34.2 | v29.36,71.93 30.52,71.93 C43.2 | C42.2 R8.1 | 47.96,52.43 49.17,52.43 50.02,53.28 C28.2 50.19,55.47 50.19,56.19 49.48,56.9 | 47.96,52.43 47.75,52.63 47.65,52.73 IC8.2 | C25.2 104.34,35.97 104.85,35.46 104.85,33.93 104.34,33.43 IC16.2 102.31,33.43 102.31,31.9 103.16,31.05 C29.2 v104.85,30.89 | v66.24,53.44 66.24,50.53 C57.2 | C55.2 59.54,34.54 57.91,34.54 | C4.2 45.11,50.39 45.62,49.89 45.72,49.78 47.14,49.78 47.96,50.6 47.96,52.43 | v28.86,8.53 31.94,8.53 R9.1 | 57.91,34.54 v55.88,36.58 | 57.91,34.54 57.91,34.44 TP38.TP | TP32.TP 46.02,20.32 v47.55,18.8 | 49.48,56.9 49.07,57.3 TP31.TP 49.68,57 | v46.13,57 49.38,57 49.48,56.9 | 4.98,7.07 4.98,6.71 5.39,6.3 8.03,6.3 8.47,6.75 R6.3
  Top 0.508: C35.2 5.49,11.95 5.49,10.77 4.98,10.26 IC7.2 4.08,10.36 3.35,10.36 2.95,9.96 v2.95,7.72 4.33,7.72 C2.2 | 12.09,59.54 TP18.TP 13.11,59.54 | 13.11,59.54 15.9,59.54 JP2.1 | C50.2 70,71.06 | 70,71.06 72.44,71.06 | 72.44,71.06 C51.2 | IC15.2 74.07,69.43 72.44,71.06 | v86.06,25.3 87.75,25.3 C18.2 | v68.99,73.25 68.99,72.07 70,71.06 | C31.2 37.35,31.7 36.07,31.7 35.56,32.21 IC17.2 35.56,34.04 | C30.2 33.02,33.53 33.83,34.34 35.26,34.34 35.36,34.24 | 35.56,34.04 35.36,34.24 | 35.56,34.04 35.56,34.24 | C43.2 34.61,71.06 35.2,70.46 | 35.2,70.46 35.97,69.7 IC11.2 | 35.2,70.46 35.8,71.06 C44.2 47.82,71.06 48.16,70.71 C45.2 48.32,71.22 51.21,71.22 51.97,70.46 | IC9.2 52.73,69.7 51.97,70.46 | C46.2 52.56,71.06 51.97,70.46 | v36.88,34.95 36.07,34.95 35.36,34.24 | 13.11,59.54 11.38,61.27 JP17.3 | v104.55,37.19 104.55,36.17 104.34,35.97
  Bottom 0.254: R29.1 82.03,17.54 82.03,18.56 v81.18,19.41 82.03,20.26 R27.1 | R31.1 77.97,20.76 v76.61,19.41 | JP14.1 89.41,32.92 v89.61,33.12 | R41.1 86.26,21.95 87.48,20.73 87.48,19.3 87.48,18.09 v87.38,17.98 86.09,16.7 R43.1
  pour Route2: 0.2,77.01 123.24,77.01 123.65,0 0.1,0
  pour Top (rank 2): 122.53,76.2 0.61,76.2 0.61,0.51 122.53,0.51
HOLD
  Top 0.254: R39.2 R38.1 69.84,24.42 70.82,25.4 73.25,25.4 75.08,27.23 75.11,27.26 75.11,27.46 IC1.37
HOLD_T
  Top 0.254: R38.2 67.67,23.47 67.26,23.06 67.26,13.31 69.9,10.67 69.9,7.32 J1.A23
MUX_DAC_EN  (via drill 0.6)
  Top 0.254: IC21.15 60.29,49.65 v59.54,50.39
  Bottom 0.254: v59.54,50.39 58.83,49.68 58.72,49.58 58.72,34.34 57.91,33.53 57.91,33.33 57.91,23.06 67.56,13.31 67.56,10.57 67.56,7.32 J1.A21
MUX_DAC_SEL  (via drill 0.6)
  Top 0.254: IC21.1 58.31,40.02 v57.81,39.52
  Bottom 0.254: J1.A20 66.24,9.17 66.24,10.57 66.24,13.61 62.59,17.27 57.3,22.76 57.3,33.53 57.3,33.73 57.91,34.34 57.91,39.42 v57.81,39.52
MUX_REF_1  (via drill 0.6)  (3 unrouted)
  Top 0.254: IC2.6 20.66,47.58 v21.03,47.95
  Bottom 0.254: 25.71,47.95 33.63,40.03 40.74,40.03 43.79,36.98 43.79,27.23 45.21,25.81 51.31,19.71 56.59,14.43 57.3,13.72 J1.A13
MUX_REF_2  (via drill 0.6)
  Top 0.254: IC3.6 20.66,31.53 v22.25,33.12
  Bottom 0.254: v22.25,33.12 32.61,33.12 39.32,26.42 42.57,26.42 54.76,14.22 J1.A11
MUX_REF_3  (via drill 0.6)
  Top 0.254: IC4.6 20.66,18.12 v21.44,18.9
  Bottom 0.254: v21.44,18.9 21.64,18.9 23.27,17.27 45.62,17.27 52.02,10.87 52.22,10.67 J1.A9
N$1
  Top 0.254: JP9.2 67.97,42.27 69.39,43.69 69.39,45.99 C36.2 | 70.34,46.53 C36.2 | C36.2 70.07,46.63 | C37.1 68.52,48.16 C36.2
N$2
  Top 0.406: R9.2 32.41,4.17 33.43,3.15 34.75,1.83 40.54,1.83 41.8,3.09 41.8,3.15 J1.B1
N$3
  Top 0.254: JP10.1 71.02,47.38 70.24,48.16 C37.2
N$4
  Bottom 0.406: J1.A46 J1.A48
N$5
  Top 0.254: IC4.1 17.54,17.52 14.63,20.42 13.62,20.42 IC20.1
N$6
  Top 0.254: JP1.2 75.88,44.25 76.75,45.11 78.13,45.11 78.2,45.17 C38.1
N$9
  Bottom 0.254: JP13.1 89.41,28.35 91.75,30.68 91.75,30.99 JP19.2
N$10
  Top 0.406: J1.B50 104.29,6.66 105.46,7.82 106.62,8.98 106.62,12.53 R8.2 C42.1
N$17
  Top 0.254: IC18.1 15.83,49.4 IC2.1
N$19
  Top 0.254: IC19.1 13.9,35.18 17.88,31.19 18.72,31.19 IC3.1
OP_MODE  (via drill 0.6)
  Top 0.254: IC1.11 75.61,35.34 v77.12,33.83
  Bottom 0.254: v77.12,33.83 79.25,31.7 79.25,27.53 79.45,27.33 80.21,26.57 80.33,26.45 R26.1 R27.2
OP_MODE_T
  Bottom 0.254: J1.A35 85.14,7.32 85.14,11.89 82.91,14.12 82.91,21.64 82.91,23.27 82.7,23.47 R26.2
OUT_S
  Top 0.254: R32.1 R33.2 66.24,16.83 66.24,18.53 66.24,23.47 68.78,26.01 73.05,26.01 73.46,26.42 74.11,27.07 74.11,27.27 IC1.35
OUT_S_T
  Top 0.254: J1.A22 68.73,10.62 66.65,12.7 64.62,12.7 64.07,13.24 R32.2
POT_R1
  Top 0.254: R1.2 90.83,57.61 90.47,57.96 | 90.47,57.96 R1.3 | JP4.3 89.31,53.38 R1.2 | 90.89,54.97 R1.2 | TP27.TP 90.83,58.32 90.47,57.96
POT_R2
  Top 0.254: R2.1 85.71,58.99 83.72,57 | 83.72,57 83.21,56.49 83.21,56.08 R2.2 83.21,53.03 83.21,51.92 JP4.1 | 83.72,57 76.91,57 TP28.TP
POT_R4
  Top 0.254: IC2.3 18.7,45.11 17.37,45.11 15.2,42.94 R4.2 17.48,41.76 17.78,41.45 19.71,39.52 TP24.TP
POT_R5
  Top 0.254: R5.2 15.2,28.1 17.07,29.97 | 17.07,29.97 18.72,29.97 IC3.3 | TP25.TP 19.71,27.33 17.07,29.97
POT_R6
  Top 0.254: IC4.3 18.76,14.77 TP26.TP
  Top 0.406: TP26.TP 20.12,13.21 19.41,13.21 19.41,12.44 R6.2
REF_ADC  (via drill 0.6)
  Top 0.254: C17.1 C18.1 90.93,25.6 v91.34,26.01 93.4,23.95 IC22.P$2 | U$5.P$2 52.76,26.83 C23.1 C24.1
  Top 0.508: C24.1 52.56,29.4 52.98,29.82 | 52.98,29.82 v53.75,30.58 | 52.98,29.82 52.83,29.67 42.98,29.67 40.64,29.67 TP17.TP 39.36,30.75 39.08,30.75 C31.1 36.96,30.75 IC17.5
  Route3 0.508: v91.34,26.01 89.81,26.01 86.77,22.96 57.3,22.96 56.29,23.98 56.29,28.04 v53.75,30.58
REFIN_DAC
  Top 0.254: IC23.10 54.88,41.77 54.97,41.86
  Top 0.406: IC8.5 49.17,51.13 49.74,51.13 C28.1 50.19,50.39 51.92,48.67 TP15.TP 53.67,46.82 54.36,46.13 54.36,44.7 54.97,44.09 54.97,41.86
RES_BIAS_EXT
  Top 0.254: IC1.6 78.11,38.18 79.76,39.83 82.2,39.83 83.21,40.84 83.21,45.31 85.85,47.95 86.77,48.87 JP4.2
RST
  Top 0.254: R36.1 R37.2 69.84,17.21 69.84,17.51 70.61,18.29 | 70.61,18.29 70.71,18.39 | IC1.38 75.61,27.15 75.61,26.94 75.59,26.92 74.27,25.6 73.46,24.79 71.83,24.79 70.82,23.77 70.82,18.49 70.61,18.29
RST_CSA  (via drill 0.6)
  Top 0.254: IC1.12 75.11,38.64 75.59,39.12 76.51,39.12 v76.61,39.22
  Bottom 0.254: R28.1 R29.2 80.33,17.72 79.45,18.59 79.45,26.21 79.15,26.52 78.64,27.03 78.64,30.07 75.59,33.12 75.59,38.2 v76.61,39.22
RST_CSA_T
  Bottom 0.254: R28.2 82.03,12.36 82.7,11.68 J1.A33
RST_T
  Top 0.254: J1.A24 71.27,10.52 68.28,13.51 68.28,14.7 R36.2
SDI_DAC  (via drill 0.6)
  Top 0.254: IC23.7 52.43,43.27 v51.61,44.09
  Bottom 0.254: J1.A18 63.6,9.17 63.6,10.77 63.6,14.22 59.94,17.88 56.08,21.74 56.08,22.05 56.08,33.93 56.08,34.14 52.53,37.69 52.53,43.08 51.61,43.99 v51.61,44.09
SDI_REF  (via drill 0.6)
  Top 0.254: IC18.5 8.68,47.1 7.42,48.36 7.42,49.17 v7.21,49.38 | IC19.5 9.29,32.88 v6.81,35.36 | IC20.5 8.78,18.15 v8.64,18.29
  Bottom 0.254: v8.64,18.29 9.86,18.29 | 9.86,18.29 12.5,15.65 12.7,15.44 45.01,15.44 48.46,11.99 48.46,9.17 J1.A6 | 9.86,18.29 8.43,18.29 7.21,19.51 7.21,25.2 7.82,25.81 8.03,26.01 8.03,33.33 | 8.03,33.33 8.03,48.56 v7.21,49.38 | v6.81,35.36 6.81,34.54 8.03,33.33
SDO_ADC1
  Top 0.254: IC22.P$8 93.4,14.39 94.69,13.11 | 94.69,13.11 95.2,12.6 95.4,12.39 J1.A43 | 93.88,12.29 94.69,13.11
  Top 0.406: R3.1 93.88,12.29
SDO_ADC2
  Top 0.254: U$5.P$8 52.76,20.09 54.61,18.24 | 54.61,18.24 58.62,14.22 58.62,9.17 J1.A14 | R7.1 53.75,17.37 54.61,18.24
SGN
  Top 0.254: R35.2 R34.1 73.9,24.42 74.47,24.99 76.1,26.62 76.1,27.03 76.1,28.46 IC1.39
SGN_T
  Top 0.254: R34.2 71.73,23.47 71.32,23.06 71.32,12.9 72.54,11.68 J1.A25
V0NDAC
  Top 0.254: 62.18,40.04 IC21.5 62.19,38.52 62.19,38.42 61.37,37.59 61.16,37.39 58.62,37.39 57.81,38.2 57.3,38.71 56.29,39.73 56.29,41.76 56.8,42.27 IC23.2
V0PDAC
  Top 0.254: IC23.1 59.93,41.77 60.35,41.35 60.35,40.09 IC21.2
V1NDAC
  Top 0.254: IC21.14 60.96,45.48 60.96,44.4 60.33,43.77 IC23.5 58.1,43.77 58.72,44.4 58.72,45.76 C53.1
V1PDAC
  Top 0.254: IC21.11 62.79,45.48 62.79,43.99 62.07,43.27 IC23.4 56.6,43.27 56.49,43.38 55.74,44.13 C52.1
V_REF_PRECHAR  (via drill 0.6)
  Top 0.254: IC1.7 77.61,39.71 v78.13,40.23
  Top 0.406: TP37.TP 37.9,39.22 40.34,41.66 40.34,43.59 JP7.2
  Bottom 0.254: JP7.2 40.54,47.14 41.35,47.95 48.77,47.95 53.24,52.43 72.85,52.43 76.1,49.17 78.33,46.94 78.33,40.44 v78.13,40.23
V_REF_PRECHAR_BUFF
  Top 0.254: IC14.1 29.52,45.56 29.57,45.52 | 29.57,45.52 29.02,45.52 IC14.2 | 29.57,45.52 31.76,45.52 C34.1 34.71,45.66 36.13,45.66 JP7.1
VDD  (via drill 0.6)
  Top 0.254: IC21.16 59.65,47.54 58.83,48.36 C39.2 57.51,48.5 v57.51,50.39 | 48.36,42.77 v48.16,42.57 | IC23.8 52.22,42.77
  Top 0.305: IC5.3 IC5.4 5.77,42.92 C3.1
  Top 0.406: C44.1 40.53,69.36 | IC6.3 IC6.4 5.12,29.49 C1.1 5.32,28.25 v6.81,28.25 | IC18.2 12.95,50.03 13.51,50.6 16.16,50.6 18.29,48.46 | 18.29,48.46 19.61,47.14 19.61,46.13 19.81,45.92 19.91,45.82 IC2.5 | v19.2,49.58 19.2,49.38 18.29,48.46 | IC19.2 12.95,35.81 13.31,36.17 14.12,36.17 17.98,32.31 | 17.98,32.31 19.41,32.31 19.61,32.11 19.61,31.09 20.02,30.68 20.12,30.58 IC3.5 | 17.98,32.31 17.98,33.93 v18.19,34.14 | IC20.2 12.95,21.18 13.31,21.54 16.56,21.54 18.7,19.41 | 18.7,19.41 19.61,18.49 19.61,17.27 19.81,17.07 20.02,16.87 IC4.5 | v19.61,20.52 19.61,20.32 18.7,19.41 | v40.54,66.65 40.34,66.65 | 5.77,42.92 6.36,42.92 6.81,42.47 v6.81,41.05 | 48.36,42.77 52.22,42.77
  Top 0.508: 39.08,67.91 39.69,68.52 39.7,68.52 C44.1 41.72,68.17 TP5.TP | 40.34,66.65 39.08,67.91 | IC7.3 IC7.4 7.42,8.68 v7.42,7.52 7.11,7.21 C2.1 | 39.08,67.91 IC11.3
  pour Route3: 0,77.22 112.07,77.22 111.86,0 0.1,0
VDD2  (via drill 0.6)
  Top 0.406: IC9.3 55.05,67.11 56.46,68.51 | 56.46,68.51 C46.1 | TP6.TP 58.22,68.17 | 58.22,68.17 56.79,68.17 56.46,68.51 | IC13.3 88.03,42.65 C7.1 87.31,42.06 86.46,42.06 86.26,41.86 86.26,41.25 | IC13.4 88.72,40.05 88.09,39.42 86.87,39.42 86.26,40.03 86.26,41.25 | IC10.3 51.28,31.96 C5.1 52.59,31.96 53.34,32.72 53.34,33.73 52.73,34.34 51.31,34.34 | 51.31,34.34 51.06,34.34 IC10.4 | v84.84,42.27 85.24,42.27 86.26,41.25 | v50.29,35.76 50.29,35.36 51.31,34.34 | v57.81,65.84 57.81,67.77 58.22,68.17
  Route3 0.406: v50.29,35.76 50.29,53.24 | 50.29,53.24 50.29,59.13 50.29,60.15 54.76,64.62 56.59,64.62 v57.81,65.84 57.91,65.73 | v84.84,42.27 75.29,51.82 52.32,51.82 51.71,51.82 50.29,53.24
VDD3  (via drill 0.6)  (1 unrouted)
  Top 0.254: C16.1 C15.1 | 89.9,21.86 C15.1 | 90.22,22.19 C15.1 | C20.1 C19.1 49.43,23.89 U$5.P$4 | 47.31,23.98 C20.1 | 45.82,24.99 47.04,23.77 | 47.04,23.77 47.51,23.77 C20.1 | 47.04,23.77 45.82,24.99 | 45.82,24.99 45.82,27.53 v45.72,27.64
  Top 0.406: C16.1 88.02,21.78 | IC16.4 101.66,35.03 C25.1 101.15,36.47
  Top 0.508: IC15.3 77.95,68.66 | 77.95,68.66 C51.1 | IC22.P$4 91.13,22.19 90.22,22.19 C15.1 | 88.02,21.78 87.11,21.78 86.26,20.93 86.26,19.81 v86.36,19.71 | IC12.8 30.57,18.7 v30.89,18.39 | IC14.8 30.06,41.56 v30.89,40.74 | v29.77,31.29 30.18,30.89 31.39,30.89 32.96,30.89 C30.1 33.96,30.95 IC17.4 IC17.3 | IC8.4 IC8.3 45.39,53.73 44.86,53.19 | C4.1 45.11,52.93 44.86,53.19 | 44.86,53.19 v44.09,53.95 | 101.15,36.47 v99.77,36.47 | IC16.3 IC16.4 | 77.95,68.66 80.16,66.45 80.57,66.45 TP45.TP 81.99,64.92 v84.02,62.89
  Route3 0.508: v30.89,18.39 32.92,20.42 32.92,26.01 | 32.92,26.01 32.92,29.06 | 32.92,29.06 32.92,37.69 32.92,38.71 | 32.92,26.01 34.44,27.53 43.59,36.68 43.59,38.2 | v29.77,31.29 30.68,31.29 32.92,29.06 | v84.02,62.89 84.73,62.18 90.22,62.18 90.53,62.18 96.22,56.49 96.22,34.95 | 43.59,38.2 43.59,27.23 | 43.59,27.23 43.59,24.99 45.62,22.96 47.65,20.93 82.2,20.93 83.41,19.71 v86.36,19.71 90.12,23.47 93.88,23.47 95.71,25.3 96.22,25.81 96.22,33.33 96.22,34.95 | v44.09,53.95 44.09,50.39 45.42,49.07 45.42,40.84 43.59,39.01 43.59,38.2 | v45.72,27.64 43.99,27.64 43.59,27.23 | v99.77,36.47 97.74,36.47 96.22,34.95
VDD_REF_1
  Top 0.305: 8.28,45.98 7.99,46.26 IC5.5 5.77,47.4 C26.1 | 8.28,45.98 R4.1 | IC18.7 12.95,46.17 12.7,45.92 8.33,45.92 8.28,45.98
  Top 0.508: C26.1 5.32,49.85 TP41.TP
VDD_REF_2
  Top 0.254: R5.1 9.29,30.03 8.54,30.79 | 8.54,30.79 7.32,32 5.81,32 IC6.5 | IC19.7 12.95,32.35 12.19,31.6 9.35,31.6 8.54,30.79
  Top 0.508: 5.81,32 5.81,33.31 5.81,33.53 | 5.81,33.53 5.81,35.14 TP42.TP | C27.1 5.71,33.63 5.81,33.53
VDD_REF_3
  Top 0.406: 11.02,11.21 R6.1 10.77,11.99 | IC20.7 12.95,17.11 12.5,16.66 11.18,15.34 TP43.TP
  Top 0.508: C35.1 6.79,12.35 IC7.5 7.38,11.21 10.48,11.21 R6.1 | 10.77,11.99 10.77,14.33 TP43.TP
VDD_SUPPLY_1
  Top 0.508: JP5.1 23.77,66.14 TP1.TP 30.21,68.17 C43.1 IC11.1
VDD_SUPPLY_2
  Top 0.508: JP8.1 TP3.TP 46.91,63.6 IC9.1 C45.1
VDD_SUPPLY_3
  Top 0.508: IC15.1 69.51,69.36 C50.1 69.43,69.29 68.17,69.29 62.28,75.18 37.19,75.18 28.25,75.18 TP44.TP 21.74,68.68 JP20.1 20.22,68.68
VDD_SUPPLY_IN_1  (1 unrouted)
  Top 0.508: 15.34,67.16 17.43,67.16 JP5.2 | JP20.2 16.87,68.68 15.34,67.16 | 15.34,67.16 TP2.TP 4.67,67.16 JP17.1
VDD_SUPPLY_IN_2
  Top 0.508: JP8.2 TP4.TP 4.06,63.6 JP17.2
VI+_FIL
  Top 0.254: JP11.2 68.63,36.12 70.61,34.14 70.63,34.12 IC1.22
VI+_FIL_DAC  (via drill 0.6)
  Top 0.254: JP11.1 66.55,36.68 66.59,36.68 C54.1 | IC21.4 61.56,38.59 61.37,38.41 v60.15,38.41
  Bottom 0.254: v60.15,38.41 64.36,38.41 JP11.1
VI-_FIL
  Top 0.254: IC1.23 69.23,33.62 68.24,33.62 JP12.2
VI-_FIL_DAC
  Top 0.254: JP12.1 63.97,35.34 63.78,35.53 | IC21.7 63.46,36.68 63.46,35.85 63.78,35.53 | C55.1 62.79,34.54 63.78,35.53
VICM  (via drill 0.6)
  Top 0.254: IC1.40 76.61,29.77 v76.51,29.87 | JP15.2 38,21.95 38.51,21.44 40.54,21.44 43.38,18.59 43.38,17.07 45.11,15.34 45.11,14.83 TP12.TP | JP15.2 38,23.98 JP15.2 | IC21.3 60.92,41.21 61.16,41.45 62.59,41.45 62.79,41.25 62.83,41.21 IC21.6 62.83,38.24 61.47,36.88 60.66,36.88 v60.05,36.27
  Route2 0.254: JP15.2 38,22.96 38.2,22.96 39.73,21.44 62.38,21.44 69.19,28.25 74.88,28.25 v76.51,29.87 76.51,31.39 76.51,32.92 74.88,34.54 73.36,34.54 72.64,35.26 64.42,35.26 63.4,36.27 v60.05,36.27
VICM_BUFF
  Top 0.254: IC12.2 IC12.1 29.52,23.63 30.38,24.49 30.63,24.74 | 30.63,24.74 30.89,24.99 33.93,24.99 JP15.1 | C32.1 31.39,23.98 30.63,24.74
VICM_MUX
  Top 0.254: IC3.4 25.95,29.93 TP11.TP | TP11.TP 28.86,27.03 | 28.86,27.03 TP11.TP | IC12.3 28.22,27.41 TP11.TP | 28.86,27.03 38.51,27.03 40.54,24.99 JP15.3 | C47.1 25.81,26.52 26.82,27.53 TP11.TP | TP11.TP 28.86,27.53 TP11.TP
VIN_CSA
  Top 0.254: JP1.3 73.61,41.25 IC1.15 | JP10.2 JP1.3 | JP1.3 73.2,41.71 72.44,42.47 72.44,44.91 73.05,45.52 76.3,45.52 76.91,46.13 79.66,48.87 TP20.TP
VIN_CSA_1
  Top 0.254: JP9.1 68.17,44.45 68.17,45.31 | 68.17,46.27 C36.1 68.17,46.47 68.17,45.31 | IC21.9 64.1,46.01 64.42,46.33 65.94,46.33 | 65.94,46.33 67.16,46.33 68.17,45.31 | C56.1 65.51,45.9 65.94,46.33
VL_ADC  (via drill 0.6)
  Top 0.254: U$5.P$7 51.86,19.72 C21.1 C22.1 51.55,17.21 51.21,16.87 | v48.67,16.36 50.7,16.36 51.21,16.87 | 51.21,16.87 52.43,15.65 53.58,14.49 R7.2 | TP16.TP 101.3,30.72 C29.1 | C14.1 C8.1 91.85,17.88 92.5,18.54 IC22.P$7 | 92.36,14.53 v92.05,14.22
  Top 0.406: IC16.5 101.46,32.03 C29.1 101.46,30.72 v103.33,28.85 | R3.2 92.01,14.19 v92.05,14.22 91.17,15.1 C14.1
  Route3 0.406: v48.67,16.36 50.19,14.83 53.24,11.79 92.76,11.79 97.64,16.66 | 97.64,16.66 97.79,16.82 | 97.79,16.82 103.53,22.55 103.53,28.65 v103.33,28.85 | 97.64,16.66 97.79,16.82 | 97.64,16.66 94.49,16.66 v92.05,14.22
VO+_BP_FIL
  Top 0.254: IC1.24 70.41,33.12 69.8,32.51 69.39,32.11 64.31,32.11 JP3.3
VO+_CH
  Top 0.254: IC1.50 82.14,29.62 82.55,29.62 JP13.3
VO+_FIL
  Top 0.254: JP3.1 66.75,24.99 68.99,27.23 70.82,27.23 71.63,28.04 71.63,29.87 71.83,30.07 71.88,30.12 IC1.30
VO-_BP_FIL  (via drill 0.6)
  Top 0.254: IC1.25 71.33,32.62 v70.82,32.11
  Bottom 0.254: v70.82,32.11 63.5,32.11 | 63.5,32.11 62.89,32.11 | JP18.3 59.54,30.79 60.86,32.11 63.5,32.11
VO-_CH
  Top 0.254: IC1.52 83.68,30.62 JP14.3
VO-_FIL  (via drill 0.6)
  Top 0.254: IC1.31 72.9,29.62 73.46,30.18 73.46,30.89 73.86,31.29 v74.47,31.29
  Bottom 0.254: JP18.1 59.54,24.89 61.06,23.37 63.3,23.37 70,30.07 71.22,31.29 v74.47,31.29
VOCM  (via drill 0.6)
  Top 0.254: IC1.36 74.61,29.12 74.47,29.26 73.97,29.26 73.61,28.91 IC1.34 73.61,27.59 73.25,27.23 v72.44,27.23 | TP14.TP 37.49,18.39 JP16.2
  Route2 0.254: v72.44,27.23 69.19,27.23 62.69,20.73 39.83,20.73 | 39.83,20.73 39.52,20.42 | 39.52,20.42 JP16.2 | 39.83,20.73 39.52,20.42
VOCM_1
  Top 0.254: IC2.4 22.76,45.17 | 22.76,45.17 24.14,45.17 24.69,45.72 25.23,45.72 C49.1 26.45,44.5 27.94,44.5 28.22,44.78 IC14.3 28.22,46.41 28.55,46.74 41.66,46.74 42.16,46.74 43.08,45.82 JP7.3 | TP30.TP 24.28,46.7 22.76,45.17
VOCM_BUFF
  Top 0.254: IC12.6 IC12.7 28.87,19.42 29.36,19.91 31.39,19.91 32.24,19.91 33.09,19.07 | JP16.1 33.26,18.9 33.09,19.07 | C33.1 32.92,18.9 33.09,19.07
VOCM_MUX
  Top 0.254: JP16.3 38.91,20.52 38.71,20.73 28.14,20.73 27.57,20.16 27.57,19.65 IC12.5 26.12,18.7 25.3,17.88 | IC4.4 21.13,15.75 TP13.TP 25.3,17.88 | C48.1 25.3,18.56 25.3,17.88
VOUT_CSA
  Top 0.254: IC1.54 82.42,31.62 82.91,32.11 90.02,32.11 91.03,31.09 91.03,30.38 JP19.3 92.46,28.96 TP9.TP
VSS  (via drill 0.6)  (2 unrouted)
  Top 0.254: IC12.4 27.57,23.74 v26.82,24.49 | v27.33,47.85 27.33,45.91 IC14.4
  Top 0.508: JP17.4 4.47,58.73 8.23,58.73 11.89,55.07 13.01,55.07 TP39.TP
  Route3 0.508: v26.82,24.49 26.32,24.99 26.32,41.76 23.52,44.55 23.27,44.81 17.17,44.81 16.46,44.81 10.67,50.6 10.67,51.41 3.96,58.12 3.96,58.62 JP17.4

## Text on the board
tNames: TP44 | C43 | C44 | C45 | C46 | TP1 | TP5 | TP6 | WAC v08 | TP2 | JP5 | TP45 | VDD1 | IC-UC | JP17 | VDD2 | JP8 | TP27 | 17/04/2015 | TP4 | TP3 | GND | VSS | JP2 | TP31 | TP18 | TP19 | JP6 | TP28 | TP41 | TP39 | TP29 | C28 | TP30 | JP4 | C4 | C57 | IC8 | TP15 | TP20 | C26 | IC18 | C39 | C37 | C53 | C36 | TP23 | IC5 | C49 | C34 | C52 | C38 | JP7 | TP21 | IC13 | C3 | C56 | C7 | C41 | TP37 | IC23 | JP9 | JP10 | JP1 | TP24 | TP34 | TP23 | C54 | TP7 | TP8 | C6 | C9 | C10 | C25 | JP11 | C27 | IC19 | IC16 | C55 | C5 | TP10 | IC6 | JP12 | JP14 | TP17 | C40 | TP38 | C29 | TP11 | C30 | IC17 | C31 | IC10 | JP13 | C24 | C13 | C12 | C11 | JP19 | C1 | C23 | TP9 | TP25 | JP15 | C18 | C32 | R38 | R34 | R18 | R22 | C17 | TP16 | TP32 | C20 | C19 | JP18 | JP3 | TP35 | R39 | R35 | R19 | R23 | JP16 | IC22 | TP33 | C48 | C47 | C21 | IC20 | C22 | C42 | R33 | R37 | R15 | R17 | R21 | R25 | C8 | R7 | C14 | C33 | C35 | TP43 | TP36 | TP13 | R32 | R36 | R14 | R16 | R20 | R24 | R8 | TP14 | TP12 | TP26 | R3 | IC7 | R9 | C2
bNames: R30 | R28 | R40 | R31 | R27 | R41 | R29 | R43 | R28 | R42